# Altium PCB PCB.pcbdoc
Units mil, origin at the board's own origin, x right, y up, seen from the top; angles counter-clockwise.
Board outline 4650 x 3355 mil, 2 copper layers (Top Layer, Bottom Layer); 15 components, 47 nets, 76 pads, 7 vias.
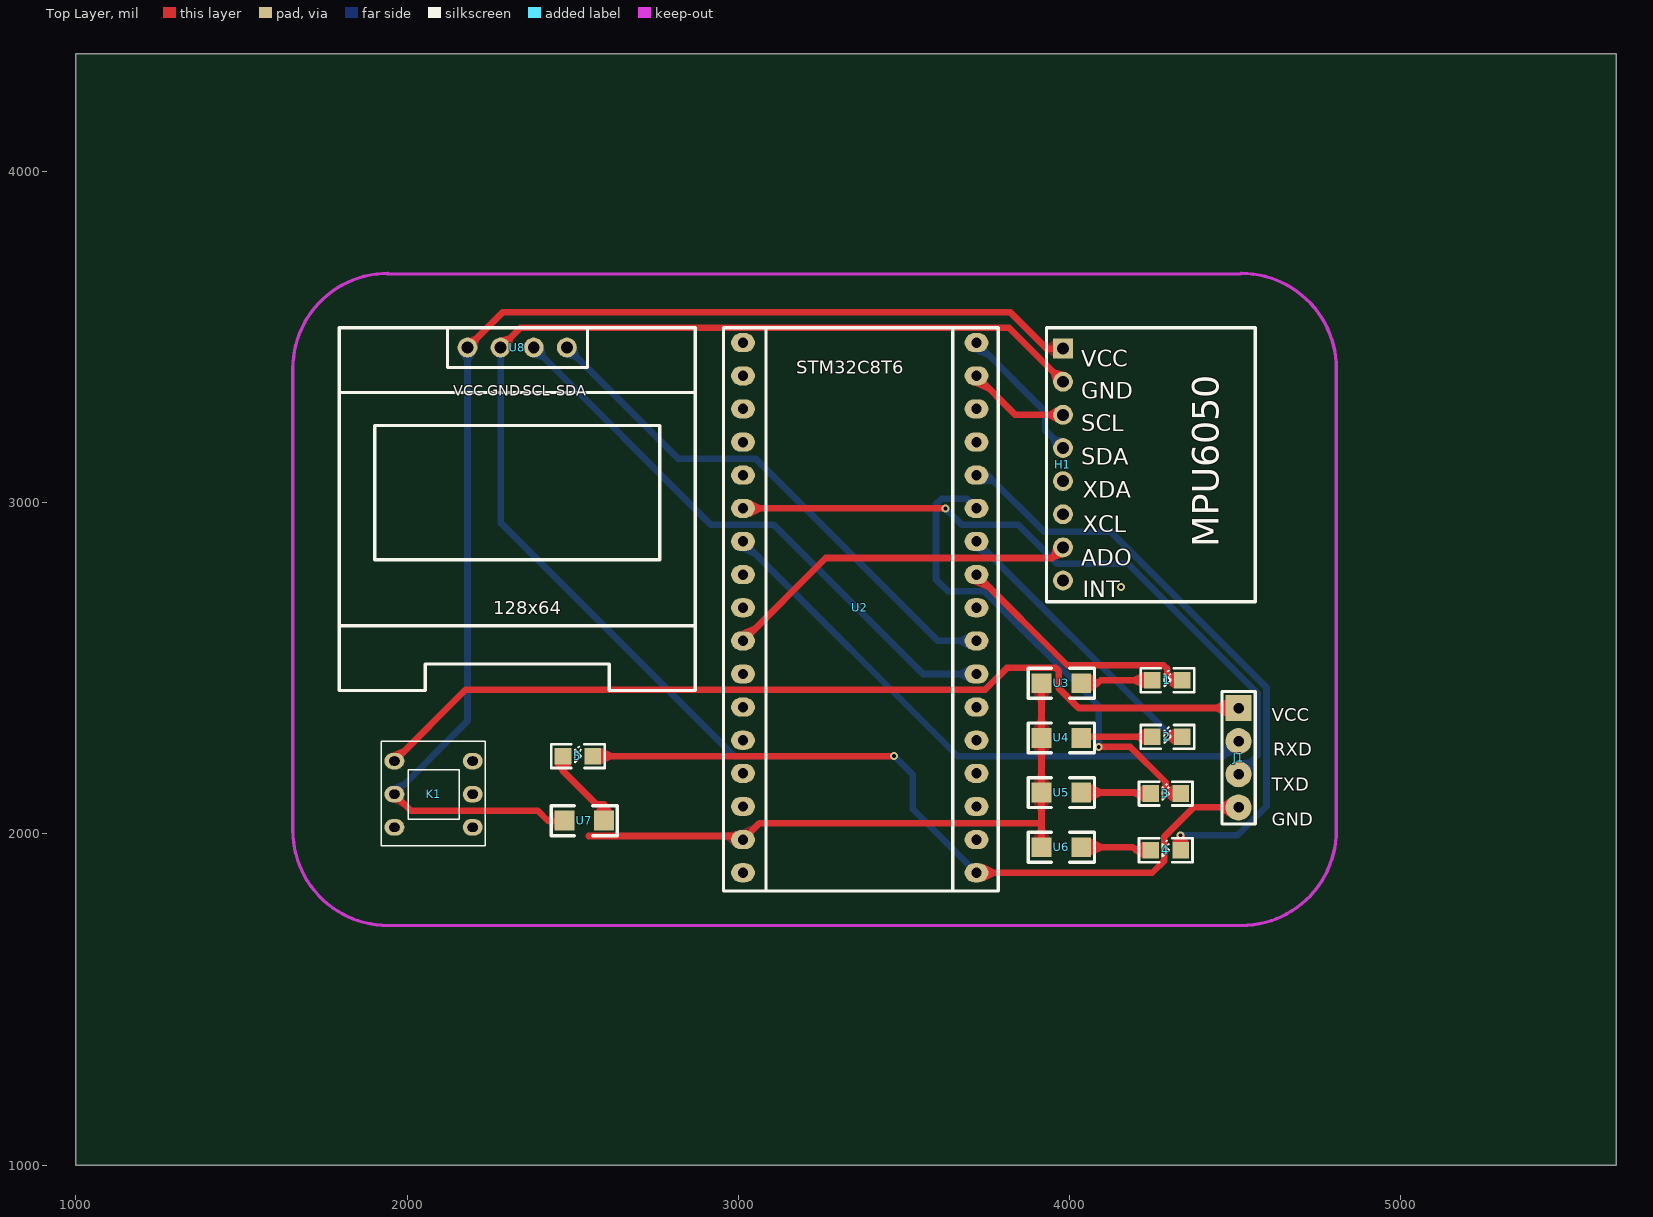
[diagram p0: Top Layer view]
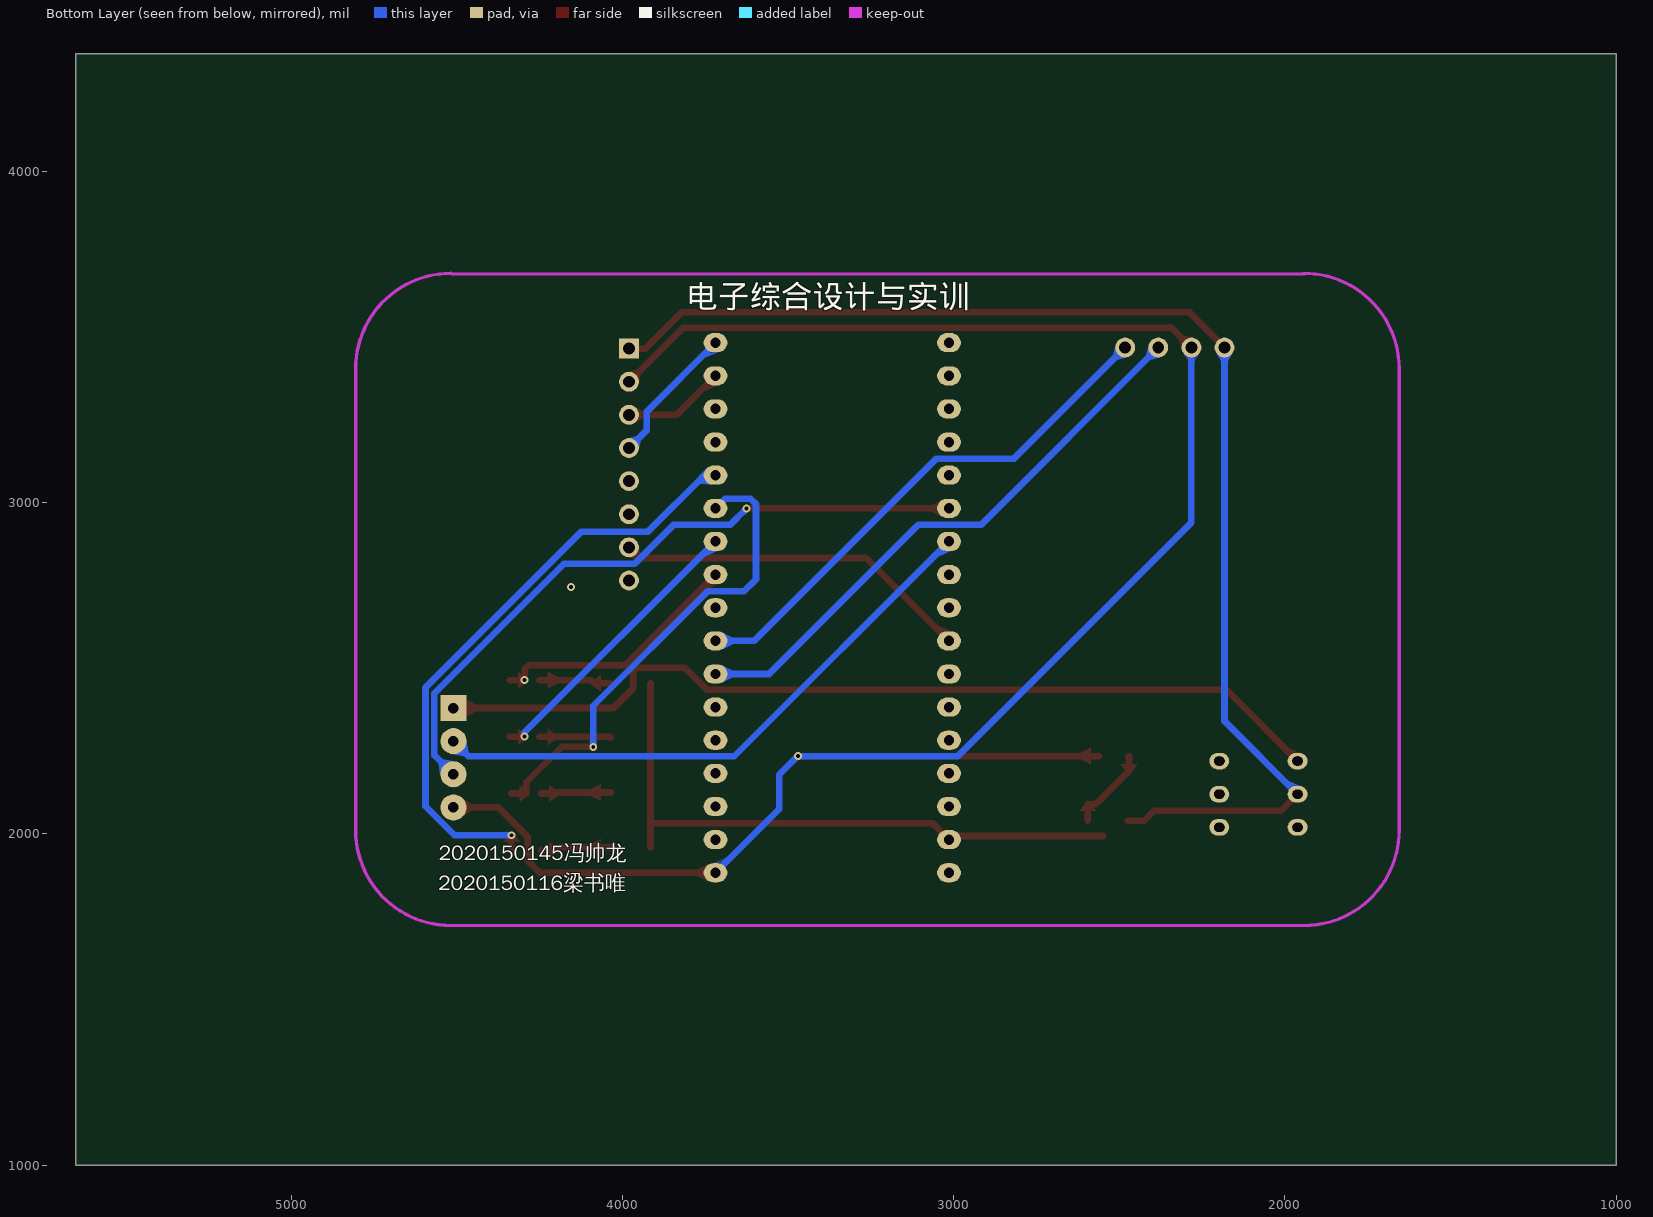
[diagram p1: Bottom Layer view, seen from below]

## Layer stack, top to bottom
Top Layer: signal copper (thickness not stored)
Dielectric: dielectric 12.6, FR-4, Dk 4.8
Bottom Layer: signal copper (thickness not stored)

## Board outline
5650,1000 1000,1000 1000,4355 5650,4355

## Components (designator, comment, footprint, x,y, rotation, side; value= is the part's Value field where it differs from the comment)
1 "LED贴片0805" LED贴片0805蓝色 4295,2464 r0 top
2 "LED贴片0805" LED贴片0805蓝色 4295,2293 r0 top
3 "LED贴片0805" LED贴片0805蓝色 4290,2122 r0 top
4 "LED贴片0805" LED贴片0805蓝色 4290,1951 r0 top
5 "LED贴片0805" LED贴片0805蓝色 2515.71,2235 r0 top
H1 "MPU6050模块" MPU6050模块 3980,3115 r0 top
J1 "排针4P" 排针4P 4509.92,2230 r270 top
K1 "8*8按键(蓝白)" 8-0.7-8-2.54 2080,2120 r0 top
U2 "STM32c8t6" STM32C8T6 3365,2707.99 r0 top
U3 "0805贴片电阻" 0805贴片电阻 3975,2455 r0 top
U4 "0805贴片电阻" 0805贴片电阻 3975,2290 r0 top
U5 "0805贴片电阻" 0805贴片电阻 3975,2125 r0 top
U6 "0805贴片电阻" 0805贴片电阻 3975,1960 r0 top
U7 "0805贴片电阻" 0805贴片电阻 2535,2040 r0 top
U8 "0.96-OLED" 0.96-OLED 1795,2432.99 r0 top

## Footprints (in the part's own frame and the unit in brackets; to place one, negate y for a bottom-side part, rotate by r counter-clockwise, add the part's x,y. Pads: shape width x height; smd on the part's side, far side on the other; paste and mask are expansions set on the pad)
0.96-OLED [mil]
  round 60 hole 36: 1(387.4,1035) 2(487.4,1035) 3(587.4,1035) 4(687.4,1035)
  silkscreen extent 0,0 1075,1095
8-0.7-8-2.54 [mil]
  oval 60x50 hole 27.56 slot 31.5 at 0 deg: 1(-118.11,100) 2(-118.11,0) 3(-118.11,-100) 4(118.11,-100) 5(118.11,0) 6(118.11,100)
  silkscreen extent -158,-155 157,160
0805贴片电阻 [mil]
  rect 60x60 smd: 1(-60,0) 2(60,0)
  silkscreen extent -100,-45 100,45
LED贴片0805蓝色 [mil]
  rect 50x50 smd: +(-45,0) -(45,0)
  silkscreen extent -81,-36 81,36
MPU6050模块 [mil]
  rect 60x60 hole 36: 1(0,350)
  round 60 hole 36: 2(0,250) 3(0,150) 4(0,50) 5(0,-50) 6(0,-150) 7(0,-250) 8(0,-350)
  silkscreen extent -50,-414 580,413
STM32C8T6 [mm]
  oval 1.828x1.462 hole 0.8: 1(-8.912,19.681) 2(-8.912,17.141) 3(-8.912,14.601) 4(-8.912,12.061) 5(-8.912,9.521) 6(-8.912,6.981) 7(-8.912,4.441) 8(-8.912,1.901) 9(-8.912,-0.639) 10(-8.912,-3.179) 11(-8.912,-5.719) 12(-8.912,-8.259) 13(-8.912,-10.799) 14(-8.912,-13.339) 15(-8.912,-15.879) 16(-8.912,-18.419) 17(-8.912,-20.959) 18(8.988,-20.959) 19(8.988,-18.419) 20(8.988,-15.879) 21(8.988,-13.339) 22(8.988,-10.799) 23(8.988,-8.259) 24(8.988,-5.719) 25(8.988,-3.179) 26(8.988,-0.639) 27(8.988,1.901) 28(8.988,4.441) 29(8.988,6.981) 30(8.988,9.521) 31(8.988,12.061) 32(8.988,14.601) 33(8.988,17.141) 34(8.988,19.681)
  silkscreen extent -10.41,-22.35 10.67,20.83
排针4P [mm]
  rect 2x2 hole 0.8: 1(-3.81,0)
  round 2 hole 0.8: 2(-1.27,0) 3(1.27,0) 4(3.81,0)
  silkscreen extent -5.08,-1.27 5.08,1.27

## Via types
v1: diameter 24, hole 12, Top Layer to Bottom Layer, tented both sides, 7 vias

## Nets (pads, with @x,y where several pads share a name; then routed paths per layer and width w, separated by ;. In a path a pad name is that pad's centre, name@x,y a point inside that pad or via, vN(x,y) a via of type N, cw(c..) or ccw(c..) an arc to the next point about the centre after c; other vN are vias at no path point)
1_+: 1.+ U3.2 | length 218.7
  Top Layer w20: U3.2 4085,2455 4094,2464 1.+
2_+: 2.+ U4.2 | length 216.2
  Top Layer w20: U4.2 4038,2293 4205,2293 2.+
3_+: 3.+ U5.2 | length 211.2
  Top Layer w20: U5.2 4197,2125 4200,2122 3.+
4_+: 4.+ U6.2 | length 213.7
  Top Layer w20: U6.2 4191,1960 4200,1951 4.+
5_+: 5.+ U7.2 | length 260.7
  Top Layer w20: 5.+ 2470.7,2190 2570.65,2090.03 2595,2090.03 ; U7.2 2595,2090
AD0: H1.7 U2.10 | length 1082.8
  Top Layer w20: U2.10 3264.1,2832.8 3947.8,2832.8 H1.7
GND: 5.- H1.2 J1.4 U2.18 U8.2 | length 6078
  Top Layer w20: U8.2 2342.19,3527.78 3817.22,3527.78 H1.2 ; 5.- v1(3470.51,2235) ; U2.18 4249.6,1882.8 4286.1,1919.4 4286.1,1991.8 4374.3,2080 J1.4
  Bottom Layer w20: U8.2 2282.4,2939.88 2987.27,2235.01 v1(3470.51,2235) 3526.5,2179 3526.5,2075.2 U2.18
H1_5: H1.5
H1_6: H1.6
H1_8: H1.8
IIC_SCL: H1.3 U2.33 | length 309.9
  Top Layer w20: U2.33 3836.7,3265 H1.3
IIC_SCL_OLED: U2.24 U8.3 | length 1744.6
  Bottom Layer w20: U8.3 2917.6,2932.8 3107.2,2932.8 3557.2,2482.8 U2.24
IIC_SDA: H1.4 U2.34 | length 426
  Bottom Layer w20: U2.34 3926.1,3275.6 3926.1,3218.9 H1.4
IIC_SDA_OLED: U2.25 U8.4 | length 1603.2
  Bottom Layer w20: U8.4 2817.6,3132.8 3052.2,3132.8 3602.2,2582.8 U2.25
K1_3: K1.3
K1_4: K1.4
K1_5: K1.5
K1_6: K1.6
PA4: 1.- U2.27 | length 772.9
  Top Layer w20: U2.27 3992.7,2509 4283.7,2509 4295,2497.8 v1(4294.97,2464) 1.-
PA5: 2.- U2.28 | length 873
  Top Layer w20: v1(4295,2293.67) 4339.3,2293.7 2.-
  Bottom Layer w20: U2.28 4295,2306.7 v1(4295,2293.67)
PA6: 3.- U2.29 | length 1466.4
  Top Layer w20: v1(4087.9,2262.73) 4183.01,2262.74 4289.97,2155.78 4289.97,2122.01 ; 4290,2122 3.-
  Bottom Layer w20: U2.29 3690.3,3011.4 3612.6,3011.4 3596.6,2995.4 3596.6,2768.4 3632.2,2732.8 3742,2732.8 4087.9,2386.9 v1(4087.9,2262.73)
PA7: 4.- U2.30 | length 1840.1
  Top Layer w20: v1(4334.61,1996.03) v1@4335,1996.04 ; 4.- v1@4335,1996
  Bottom Layer w20: U2.30 3752,3082.8 3922.2,2912.6 4123.2,2912.6 4594.1,2441.8 4594.1,2083.5 4506.6,1996 v1(4334.61,1996.03)
POWER: H1.1 K1.2 U2.16 U3.1 U4.1 U5.1 U6.1 U7.1 U8.1 | length 5786.4
  Top Layer w20: K1.2 2011.9,2070 2395,2070 2425,2040 U7.1 ; U8.1 2289.4,3575 3820,3575 3930,3465 H1.1 ; 2548.1,1993.9 3025.2,1993.9 3039.1,2007.8 3064.1,2032.8 3915,2032.8 ; U2.16 3039.14,2007.83 ; U6.1 3915,2032.8 ; U3.1 U4.1 U5.1 3915,2032.8
  Bottom Layer w20: K1.2 2182.4,2340.5 U8.1
RXD: J1.2 U2.7 | length 1783
  Bottom Layer w20: U2.7 3662.3,2234.7 4464.6,2234.7 J1.2
TXD: J1.3 U2.6 | length 2053.2
  Top Layer w20: U2.6 v1(3624.69,2982.82)
  Bottom Layer w20: v1(3624.69,2982.82) 3674.69,2932.82 3846.06,2932.82 3963.88,2815.01 4176.71,2815.01 4567.97,2423.74 4567.97,2238.05 J1.3
U2_1: U2.1
U2_2: U2.2
U2_3: U2.3
U2_4: U2.4
U2_5: U2.5
U2_8: U2.8
U2_9: U2.9
U2_11: U2.11
U2_12: U2.12
U2_13: U2.13
U2_14: U2.14
U2_15: U2.15
U2_17: U2.17
U2_19: U2.19
U2_20: U2.20
U2_21: U2.21
U2_22: U2.22
U2_23: U2.23
U2_26: U2.26
U2_31: U2.31
U2_32: U2.32
VCC: J1.1 K1.1 | length 2745.4
  Top Layer w20: K1.1 2176.9,2435 3744.4,2435 3810.5,2501.1 3958.6,2501.1 3966.7,2493 3966.7,2440.5 4027.1,2380 J1.1
copper on no net:
  other v1: 4155,2745

## Polygon pours and split planes (outlines as drawn)
GND on Bottom Layer (solid): 1510,3835 1530,3815 5035,3815 5075,3775 5075,1545 5065,1555 1525,1555
POWER on Top Layer (solid): 1500,3845 1510,3855 5150,3855 5145,1500 5045,1505 1500,1505

## Keep-outs
Keep-Out Layer:
  lines w10: 1655.4,2010.67 ccw(c1942.49,2010.67) 1942.49,1723.59 ; 1655.4,3405 cw(c1942.49,3405) 1942.49,3692.09 ; 4517.91,1723.59 ccw(c4517.91,2010.67) 4805,2010.67 ; 4517.91,3692.09 cw(c4517.91,3405) 4805,3405

## Other copper
Top Layer:
  region net GND: 2280.52,3497.93 2312.34,3466.11 2318.35,3489.8 2304.21,3503.94
  region net GND: 3950.06,3363.12 3981.88,3394.94 3958.19,3400.95 3944.05,3386.81
  region net IIC_SCL: 3960.16,3287.5 3960.15,3242.5 3939.16,3255 3939.16,3275
  region net AD0: 3950.06,2866.88 3981.88,2835.06 3958.19,2829.05 3944.05,2843.19
  region net GND: 4483.88,2109.53 4483.88,2050.47 4456.32,2070 4456.32,2090
  region net GND: 3462.58,2226 3462.58,2244 3454.18,2245 3454.18,2225
  region net TXD: 3616.76,2973.82 3616.76,2991.82 3608.36,2992.82 3608.36,2972.82
  region net PA7: 4343.8,1988.32 4325.8,1987.88 4325,1979.46 4345,1979.94
  region net PA6: 4095.84,2253.73 4095.84,2271.73 4104.24,2272.73 4104.24,2252.73
  region net PA5: 4302.94,2284.67 4302.94,2302.67 4311.34,2303.67 4311.34,2283.67
  region net PA4: 4285.97,2471.94 4303.97,2471.94 4304.97,2480.34 4284.97,2480.34
  region net PA4: 4302.91,2455 4302.91,2473 4311.31,2474 4311.31,2454
  region net PA4: 4315,2439 4315,2489 4294.97,2474 4294.97,2454
  region net 1_+: 4225,2439 4225,2489 4195,2474 4195,2454
  region net PA5: 4315,2268.67 4315,2318 4295,2303.67 4295,2283.67
  region net 2_+: 4225,2268.01 4225,2318 4204.97,2303.01 4204.97,2283.01
  region net PA6: 4310,2097 4310,2147 4289.97,2132 4289.97,2112
  region net 3_+: 4220,2097 4220,2147 4199.97,2132 4199.97,2112
  region net PA7: 4310,1976 4360,1976 4345,1996.04 4325,1996.04
  region net 4_+: 4220,1926.01 4220,1976 4199.97,1961.01 4199.97,1941.01
  region net GND: 2585.71,2260 2585.71,2210 2615.71,2225 2615.71,2245
  region net 5_+: 2495.71,2210 2445.71,2210 2460.71,2189.98 2480.71,2189.98
  region net VCC: 4470.55,2355 4470.55,2405 4440.55,2390 4440.55,2370
  region net 1_+: 4065,2480 4065,2430 4085.03,2445 4085.03,2465
  region net 3_+: 4065,2150 4065,2100 4095,2115 4095,2135
  region net 4_+: 4065,1985 4065,1935 4095,1950 4095,1970
  region net 5_+: 2570,2070 2620,2070 2605,2090.03 2585,2090.03
  region net VCC: 1956.89,2245 1966.89,2245 2005.98,2249.94 1986.85,2259.09
  region net IIC_SCL: 3726.05,3354.04 3711.66,3354.04 3750.86,3336.69 3772.19,3343.64
  region net TXD: 3035.59,2957.82 3035.59,3007.82 3065.59,2992.82 3065.59,2972.82
  region net PA4: 3726.05,2754.04 3711.66,2754.04 3750.86,2736.69 3772.19,2743.64
  region net AD0: 3006.94,2611.6 3021.33,2611.6 3067.48,2622.02 3046.14,2628.97
  region net GND: 3740.31,1857.82 3740.31,1907.82 3770.31,1892.82 3770.31,1872.82
Bottom Layer:
  region net IIC_SDA_OLED: 2480.53,3438.05 2512.34,3469.87 2518.36,3446.18 2504.21,3432.04
  region net IIC_SCL_OLED: 2380.53,3438.05 2412.34,3469.87 2418.36,3446.18 2404.21,3432.04
  region net POWER: 2204.9,3448.15 2159.9,3448.15 2172.4,3427.15 2192.4,3427.15
  region net IIC_SDA: 3950.06,3163.12 3981.88,3194.94 3958.19,3200.95 3944.05,3186.81
  region net RXD: 4470.63,2282.47 4512.38,2240.71 4479.09,2235.03 4464.95,2249.17
  region net TXD: 4507.45,2219.29 4549.21,2177.54 4554.89,2210.83 4540.75,2224.97
  region net TXD: 3636.67,2983.58 3623.94,2970.85 3629.17,2964.2 3643.32,2978.34
  region net PA7: 4342.55,1987.04 4342.54,2005.04 4350.94,2006.04 4350.95,1986.04
  region net PA6: 4078.9,2270.67 4096.9,2270.67 4097.9,2279.07 4077.9,2279.07
  region net PA5: 4286,2301.61 4304,2301.61 4305,2306.68 4285,2306.68
  region net POWER: 1956.89,2145 1966.89,2145 2006,2149.97 1986.85,2159.11
  region net IIC_SDA: 3726.05,3454.04 3711.66,3454.04 3750.86,3436.69 3772.19,3443.64
  region net PA7: 3748.18,3101.23 3730.63,3054.41 3763.64,3057 3771.35,3077.57
  region net RXD: 3021.33,2854.04 3006.94,2854.04 3046.13,2836.69 3067.46,2843.64
  region net PA5: 3726.05,2854.04 3711.66,2854.04 3750.86,2836.69 3772.19,2843.64
  region net IIC_SDA_OLED: 3697.41,2607.82 3697.41,2557.82 3667.41,2572.82 3667.41,2592.82
  region net IIC_SCL_OLED: 3697.41,2507.82 3697.41,2457.82 3667.41,2472.82 3667.41,2492.82

## Silkscreen, mask and mechanical layers (free items; w line width, h text height)
Top Overlay:
  text "VCC" at 4610,2340.32 h39.37
  text "RXD" at 4615,2235.32 h39.37
  text "TXD" at 4610,2130.32 h39.37
  text "GND" at 4610,2025.32 h39.37
Bottom Overlay:
  text "电子综合设计与实训" at 3805,3565 h118.11
  text "2020150145冯帅龙" at 4555,1905 h78.74
  text "2020150116梁书唯" at 4555.2,1815 h78.74
Document:
  lines w0.1: 3324.99,2677.49 3325.01,2677.51

## Text inside footprints (layer, text, board x,y; h text height)
H1: Top Overlay "VCC" at 4035,3409.8 h50; Top Overlay "GND" at 4035,3314 h50; Top Overlay "SCL" at 4035,3215 h50; Top Overlay "SDA" at 4035,3115 h50; Top Overlay "XDA" at 4040,3015 h50; Top Overlay "ADO" at 4035,2810 h50; Top Overlay "XCL" at 4040,2910 h50; Top Overlay "INT" at 4040,2715 h50; Top Overlay "MPU6050" at 4450,2865 h80 r90
U2: Top Overlay "STM32C8T6" at 3175,3388.3 h39.37
U8: Top Overlay "128x64" at 2260,2663.3 h39.37; Top Overlay "VCC" at 2140,3323.04 h31.5; Top Overlay "GND" at 2242.87,3323.04 h31.5; Top Overlay "SCL" at 2350.03,3323.04 h31.5; Top Overlay "SDA" at 2450,3323.04 h31.5